# Altium PCB P-MT3620RDB-PS-1-0.PcbDoc (part 1 of 2)
Units mm, origin at the board's own origin, x right, y up, seen from the top; angles counter-clockwise.
Board outline 50 x 35 mm, 4 copper layers (Component Side, GND, 3V3, Bottom Layer), stack 0.537 mm thick; 57 components, 42 nets, 256 pads, 95 vias.
Unrouted connection lines stored in the file: 54.
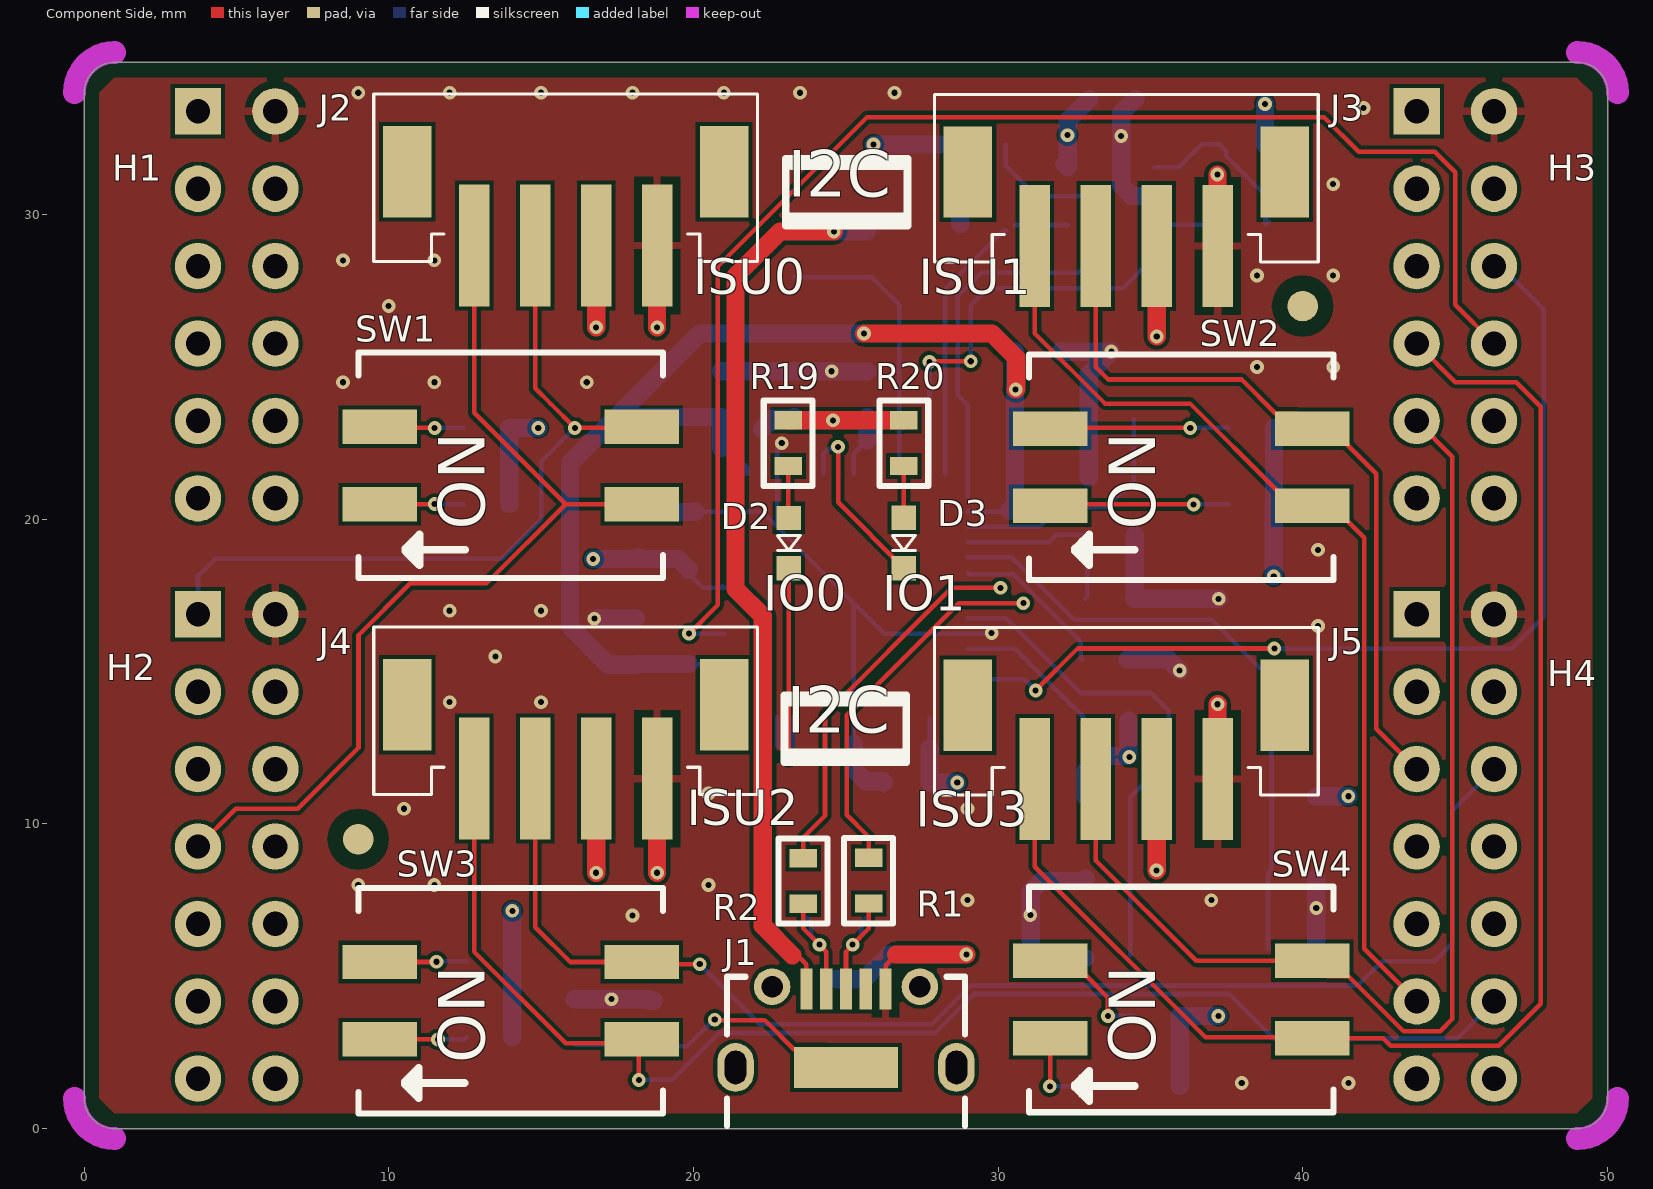
[diagram p0: Component Side view]
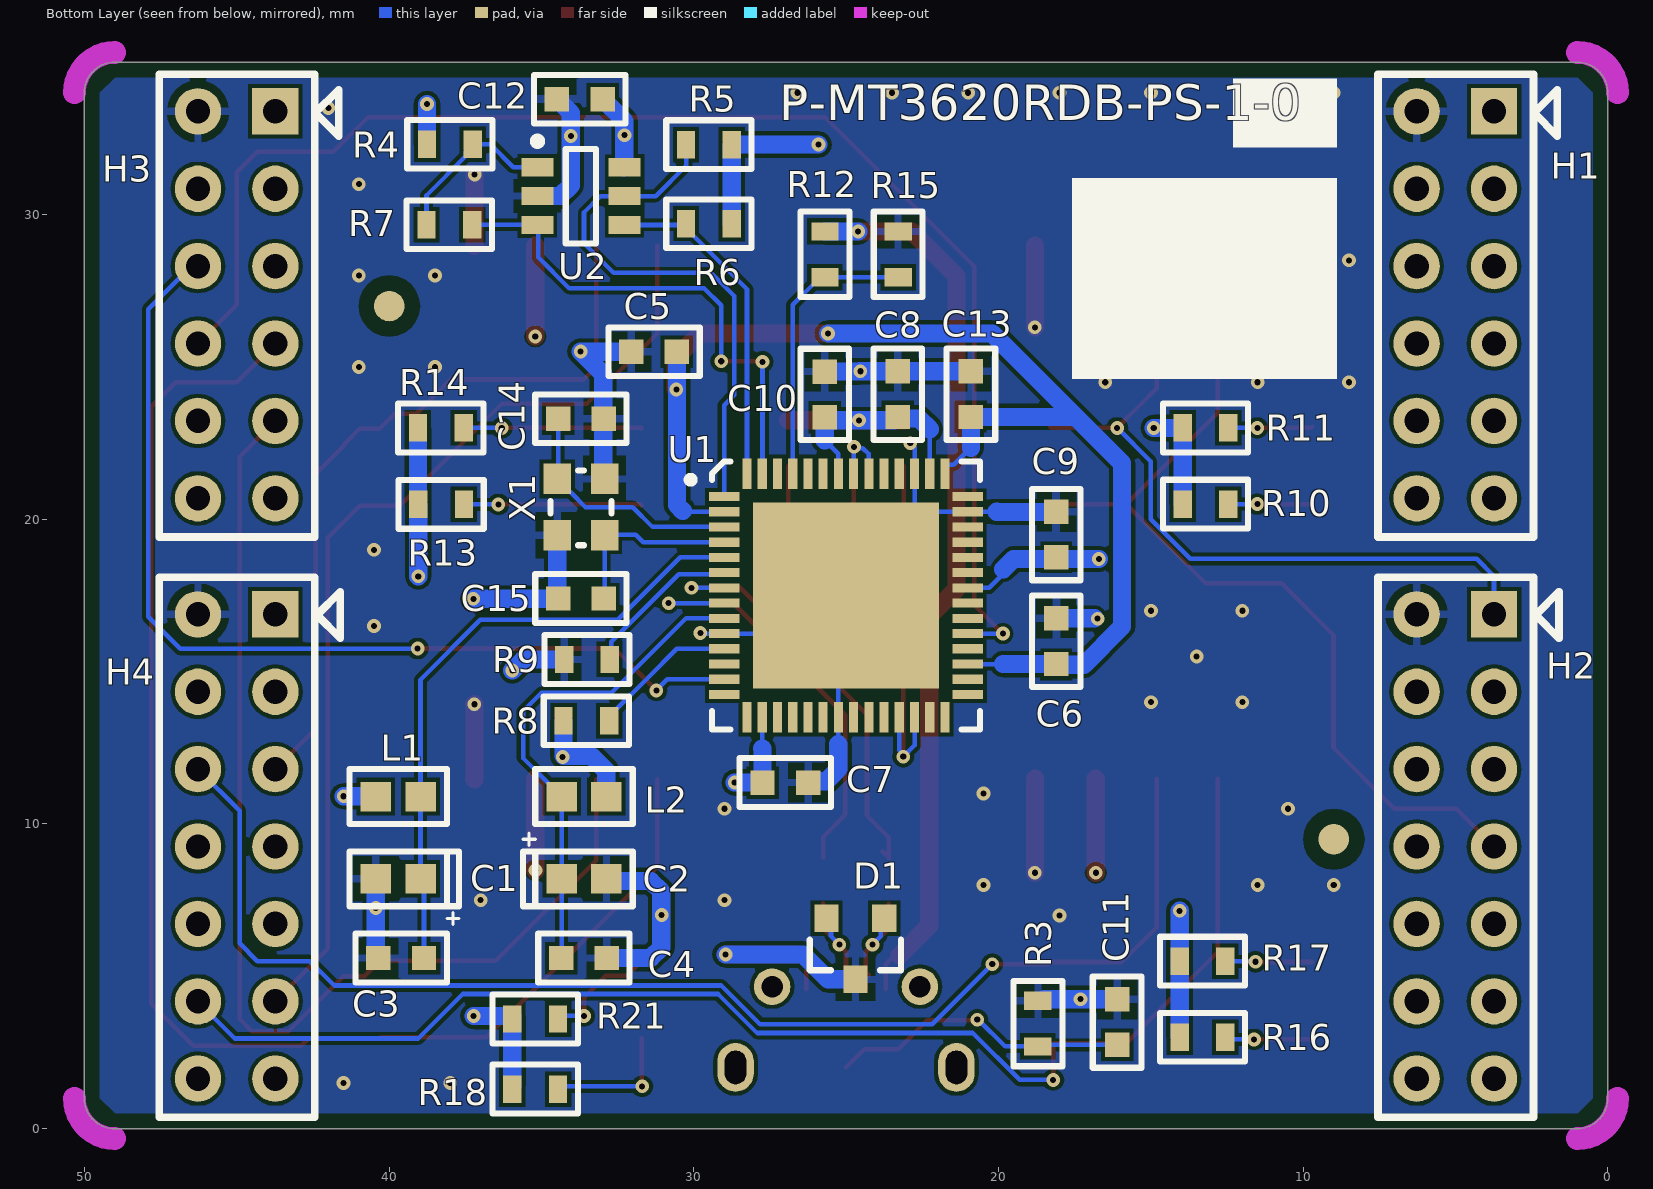
[diagram p1: Bottom Layer view, seen from below]
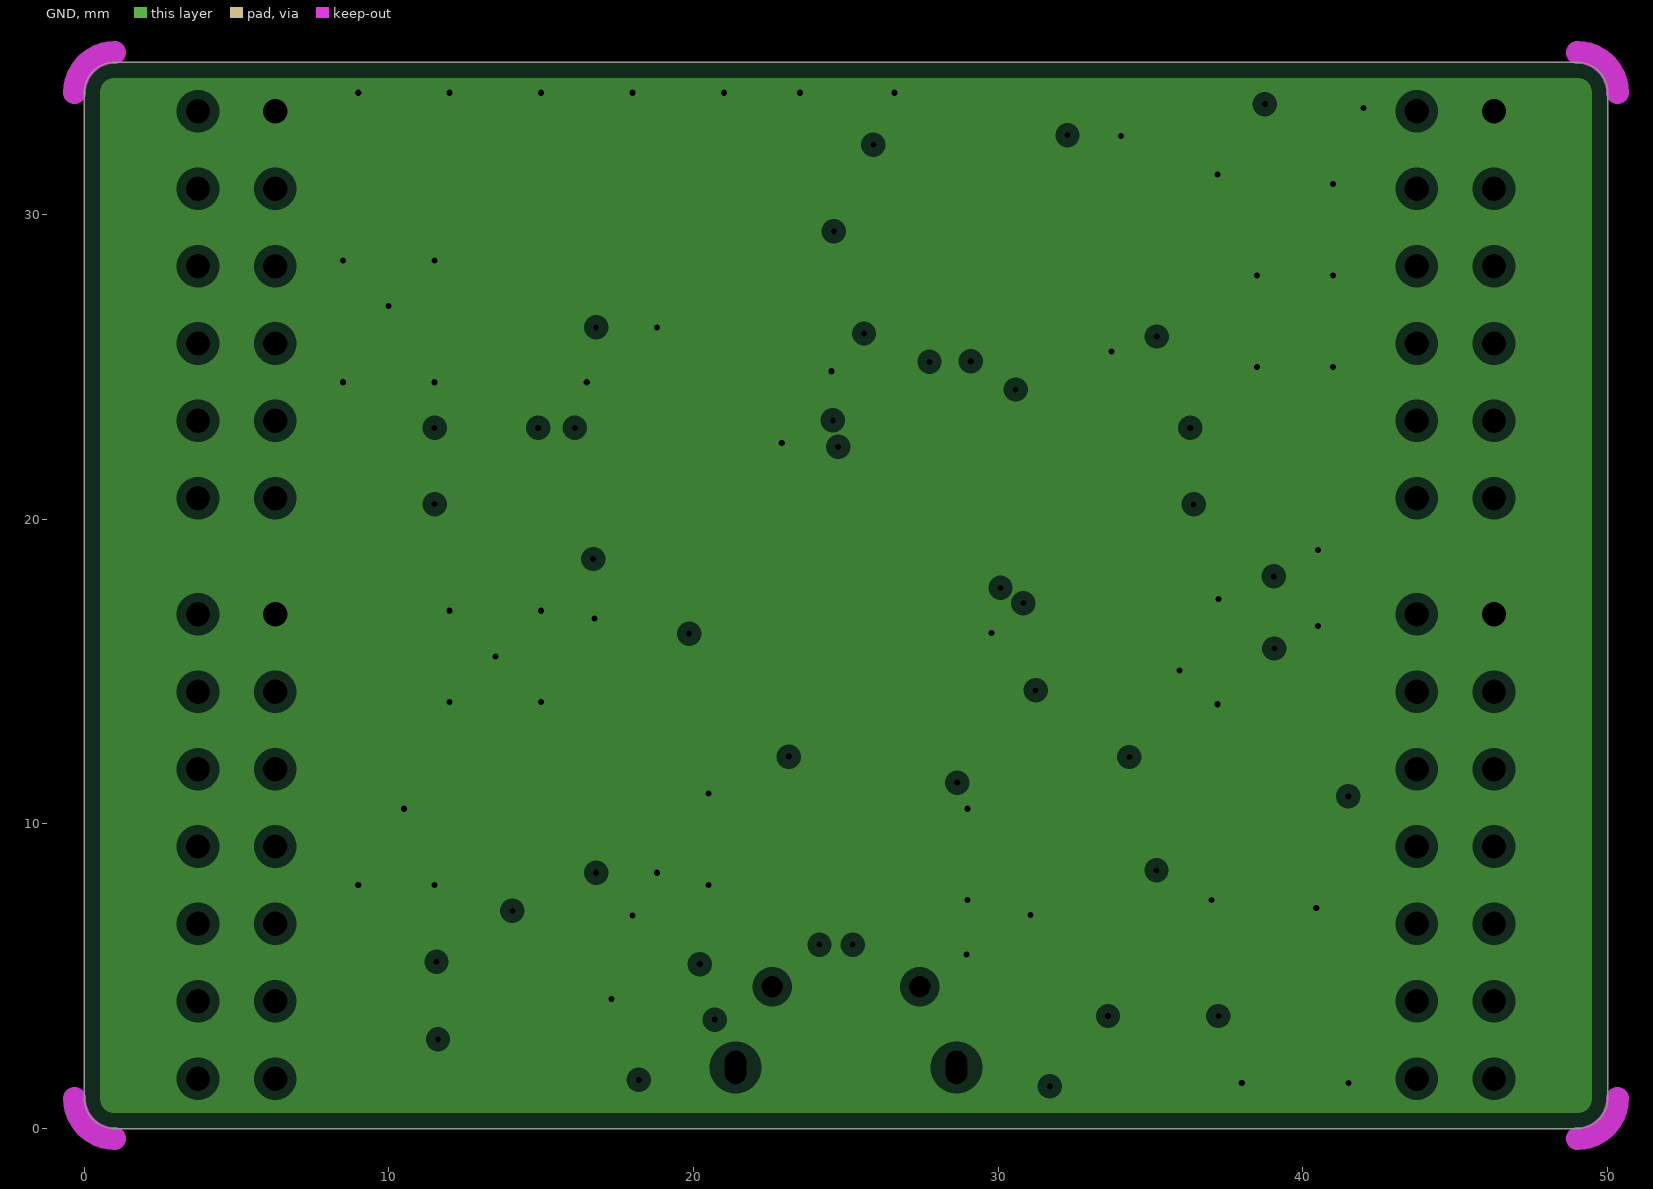
[diagram p2: GND, clearances drawn from the general rule]
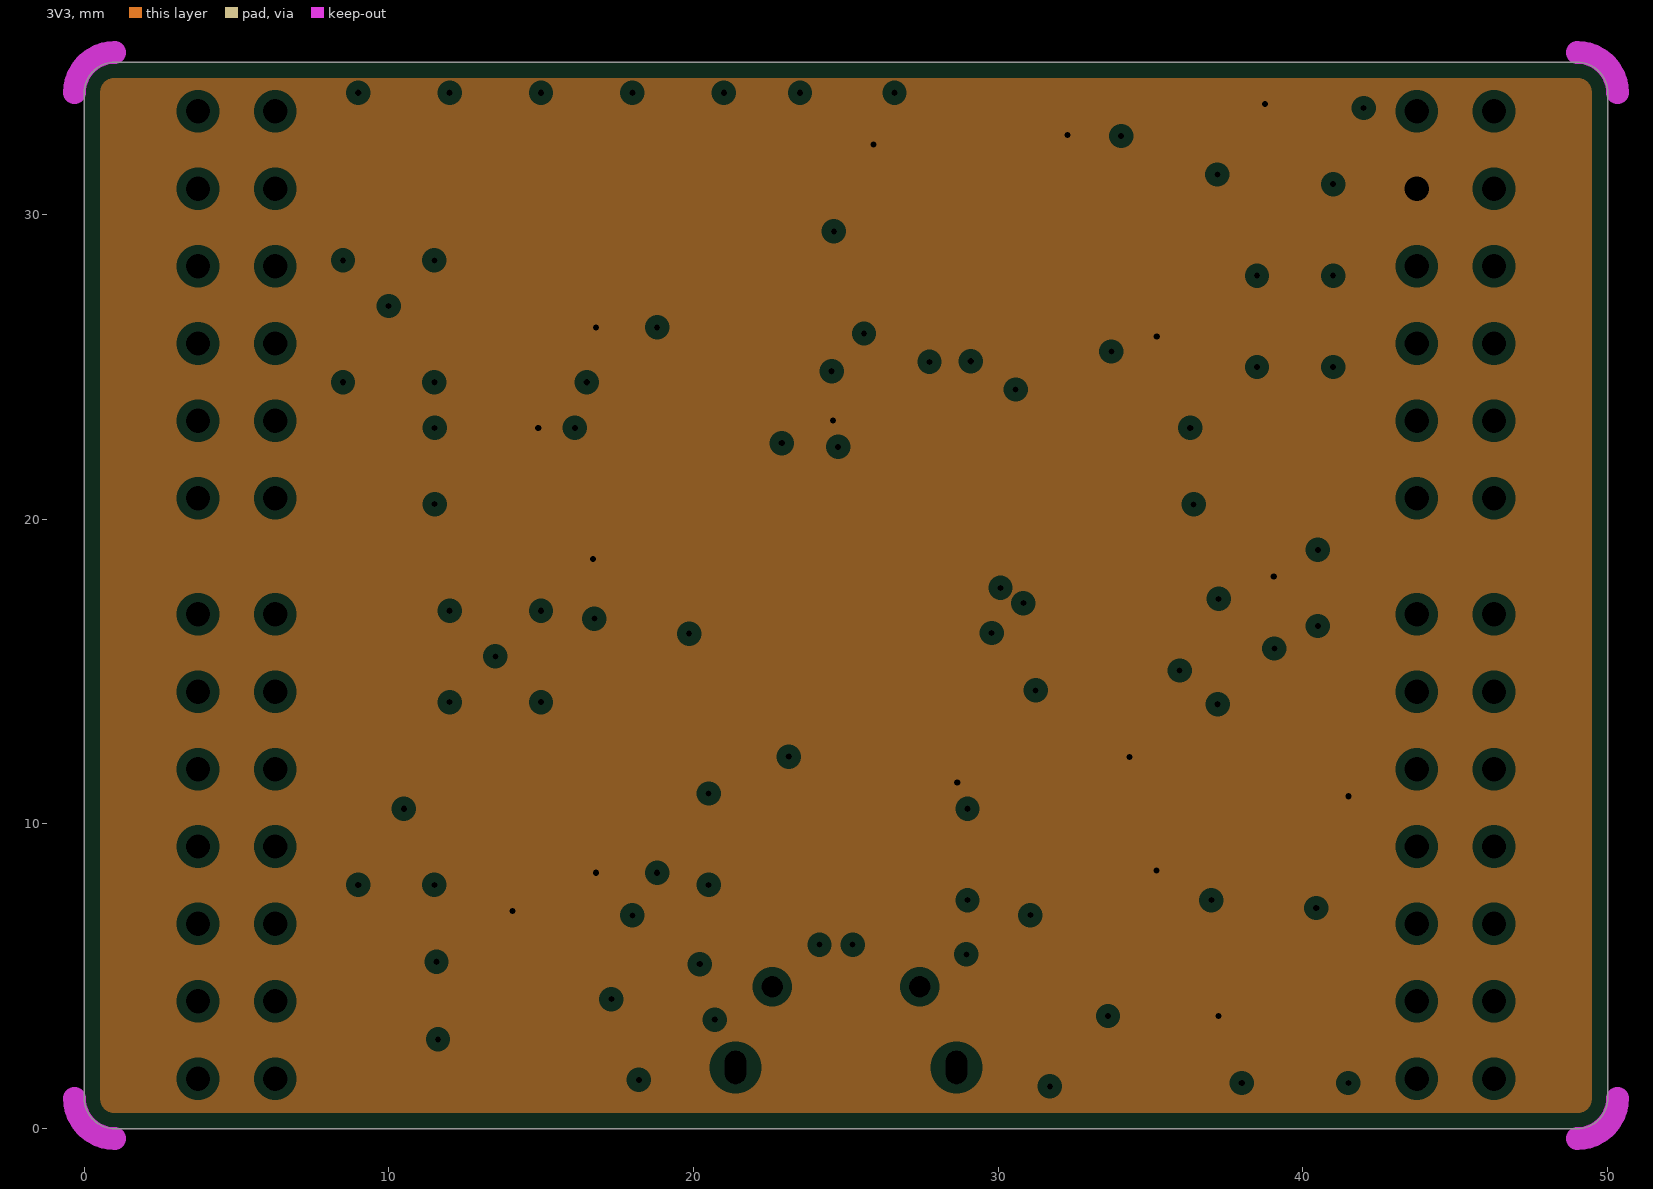
[diagram p3: 3V3, clearances drawn from the general rule]

## Layer stack, top to bottom
Top Solder: solder mask 0.0102, Solder Resist, Dk 3.5
Component Side: signal copper 0.0356
Dielectric 2: prepreg 0.0711, PP-006, Dk 4.1
GND: plane copper 0.035, net GND
Dielectric 1: core 0.254, FR-4, Dk 4.2
3V3: plane copper 0.035, net 3V3
Dielectric 3: prepreg 0.0711, PP-006, Dk 4.1
Bottom Layer: signal copper 0.0356
Solder Side: solder mask 0.0102, Solder Resist, Dk 3.5

## Board outline
1.01,0 cw(c1.01,1) 0.01,1 0.01,34 cw(c1.01,34) 1.01,35 49.01,35 cw(c49.01,34) 50.01,34 50.01,1 cw(c49.01,1) 49.01,0

## Design rules (kind name [scope] priority, off if disabled: settings)
Clearance Clearance_RF [InNetClass('RF') vs InNet('GND')] p1: gap=0.17 ignorepadtopadclearanceinfootprint=FALSE
Clearance Clearance_RFD [InNetClass('RFD') vs InNet('GND')] p2: gap=0.127 ignorepadtopadclearanceinfootprint=FALSE
Clearance Clearance_Fiducials [(IsPad) AND (Name = 'Free-1') vs InNet('GND')] p3: gap=0.5 ignorepadtopadclearanceinfootprint=FALSE
Clearance [All] p4: gap=0.125 ignorepadtopadclearanceinfootprint=FALSE
ComponentClearance [All] p1: gap=0.125 collisioncheckmode=3 verticalgap=0.254 showdistances=FALSE
DiffPairsRouting [All] p1: maxlimit=0.3 minlimit=0.125 mostfreqgap=0.125 toplayer_minwidth=0.125 toplayer_maxwidth=0.3 toplayer_prefwidth=0.125 bottomlayer_minwidth=0.125 bottomlayer_maxwidth=0.3 bottomlayer_prefwidth=0.125 maxuncoupledlength=12.7
HoleSize [All] p1: absolutevalues=TRUE maxlimit=3 minlimit=0.2 maxpercent=80.000 minpercent=20.000
MinimumSolderMaskSliver [All] p1: minsoldermaskwidth=0.01
PlaneClearance [All] p1: clearance=0.3
PlaneConnect PlaneConnect_IsVia [IsVia] p1: planeconnectstyle=Direct reliefexpansion=0.508 reliefentries=4 reliefconductorwidth=0.254 reliefairgap=0.254
PlaneConnect [All] p2: planeconnectstyle=Relief reliefexpansion=0.508 reliefentries=4 reliefconductorwidth=0.254 reliefairgap=0.254
PolygonConnect PolygonConnect_1 [All vs IsNamedPolygon('Component Side-No Net')] p1: connectstyle=Relief reliefconductorwidth=0.254 reliefentries=4 polygonreliefangle="90 Angle" airgapwidth=0.254
PolygonConnect PolygonConnect_IsVia [IsVia] p2: connectstyle=Direct reliefconductorwidth=0.254 reliefentries=4 polygonreliefangle="90 Angle" airgapwidth=0.254
PolygonConnect PolygonConnect_RF [HasCompParameter('NoThermalRelief')] p3: connectstyle=Direct reliefconductorwidth=0.254 reliefentries=4 polygonreliefangle="90 Angle" airgapwidth=0.254
PolygonConnect [All] p4: connectstyle=Relief reliefconductorwidth=0.254 reliefentries=4 polygonreliefangle="90 Angle" airgapwidth=0.254
RoutingCorners [All] p1: cornerstyle=45-Degree minsetback=1 maxsetback=1
RoutingVias [All] p1: holewidth=0.2 width=0.45 viastyle="Through Hole" minholewidth=0.2 minwidth=0.45 maxholewidth=0.2 maxwidth=0.45
SilkToSilkClearance [All] p1: silktosilkclearance=0.05
SilkToSolderMaskClearance [IsPad] p1: minsilkscreentomaskgap=0.1 clearancetoexposedcopper=TRUE
SolderMaskExpansion [All] p1: expansion=0.102 istentingtop=FALSE
Width [All] p1: maxlimit=1 minlimit=0.125 preferedwidth=0.15 minimp=50.000000 maximp=50.000000 favimp=50.000000
21 further rules are at their usual default settings.

## Components (designator, comment, footprint, x,y, rotation, side; value= is the part's Value field where it differs from the comment)
C1 "4.7UF" C0603_TANT 39.71,8.2 r0 bottom
C2 "4.7UF" C0603_TANT 33.61,8.2 r180 bottom
C3 "0.1uF" C0603 39.61,5.6 r0 bottom
C4 "0.1uF" C0603 33.61,5.6 r0 bottom
C5 "0.1uF" C0603 31.31,25.5 r180 bottom
C6 "0.1uF" C0603 18.11,16 r270 bottom
C7 "0.1uF" C0603 27,11.36 r180 bottom
C8 "0.1uF" C0603 23.31,24.11 r270 bottom
C9 "0.1uF" C0603 18.11,19.5 r270 bottom
C10 "0.1uF" C0603 25.71,24.1 r270 bottom
C11 "22pF" C0603 16.11,3.5 r270 bottom
C12 "0.1uF" C0603 33.75,33.79 r180 bottom
C13 "3.3uF" C0603 20.91,24.11 r270 bottom
C14 "10pF" C0603 33.71,23.3 r180 bottom
C15 "10pF" C0603 33.71,17.4 r0 bottom
D1 "PGB102ST23WRHF" SOT95P245X110-3N 24.7,5.9 r270 bottom
D2 "Green" "Rohm SML-D12 Green" 23.135,19.22 r90 top
D3 "Green" "Rohm SML-D12 Green" 26.91,19.225 r90 top
H1 "ESQ-106-14-G-D" ESQ-106 5.01,27.04 r270 bottom locked
H2 "ESQ-107-14-G-D" ESQ-107 5.01,9.261 r270 bottom locked
H3 "ESQ-106-14-G-D" ESQ-106 45.01,27.04 r270 bottom locked
H4 "ESQ-107-14-G-D" ESQ-107 45.01,9.261 r270 bottom locked
J1 "MCR-B-S-RA-SMT-CS5A-NF-T/R" MCR-B-S-RA-SMT-CS5-T/R 25.01,4.585 r180 top
J2 "Grove SMD" "GROVE WAY SMD" 15.81,30.2 r0 top locked
J3 "Grove SMD" "GROVE WAY SMD" 34.21,30.187 r0 top locked
J4 "Grove SMD" "GROVE WAY SMD" 15.81,12.7 r0 top locked
J5 "Grove SMD" "GROVE WAY SMD" 34.21,12.687 r0 top locked
L1 "120 Ohms 2A" "0603 IND" 39.71,10.9 r180 bottom
L2 "120 Ohms 2A" "0603 IND" 33.61,10.9 r0 bottom
R1 "10R" R0603 25.75,8.14 r90 top
R2 "10R" R0603 23.6,8.13 r90 top
R3 "1M" R0603 18.71,3.45 r270 bottom
R4 "10K" R0603 38.01,32.31 r0 bottom
R5 "10K" R0603 29.51,32.3 r180 bottom
R6 "10K" R0603 29.51,29.7 r180 bottom
R7 "2K2" R0603 38.03,29.67 r0 bottom
R8 "1K" R0603 33.53,13.39 r180 bottom
R9 "12K" R0603 33.51,15.4 r0 bottom
R10 "4K7" R0603 13.21,20.5 r0 bottom
R11 "4K7" R0603 13.21,23 r180 bottom
R12 "4K7" R0603 25.7,28.7 r90 bottom
R13 "4K7" R0603 38.3,20.49 r0 bottom
R14 "4K7" R0603 38.31,23 r180 bottom
R15 "10K" R0603 23.3,28.7 r90 bottom
R16 "4K7" R0603 13.31,3 r0 bottom
R17 "4K7" R0603 13.31,5.5 r180 bottom
R18 "4K7" R0603 35.21,1.3 r180 bottom
R19 "220R" R0603 23.11,22.5 r90 top
R20 "220R" R0603 26.91,22.5 r90 top
R21 "4K7" R0603 35.21,3.6 r0 bottom
SW1 "DPST" 204-211ST 14.01,21.77 r180 top locked
SW2 "DPST" 204-211ST 36.01,21.71 r180 top locked
SW3 "DPST" 204-211ST 14.01,4.2 r180 top locked
SW4 "DPST" 204-211ST 36.01,4.24 r180 top locked
U1 "FT2232H-56Q" FT2232H-56Q 25.01,17.5 r180 bottom locked
U2 "93LC56BT-I/OT" SOT23-93C56B 33.71,30.61 r180 bottom
X1 "12MHz" TXC8Z 33.71,20.4 r90 bottom

## Footprints (in the part's own frame and the unit in brackets; to place one, negate y for a bottom-side part, rotate by r counter-clockwise, add the part's x,y. Pads: shape width x height; smd on the part's side, far side on the other; paste and mask are expansions set on the pad)
204-211ST [mm]
  rect 2.44x1.13 smd: 1(-4.3,1.27) 2(-4.3,-1.27) 3(4.3,-1.27) 4(4.3,1.27)
  silkscreen extent -5,-3.7 5,3.7
"0603 IND" [mm]
  rect 1x0.97 smd: 1(-0.735,0) 2(0.735,0)
  silkscreen extent -1.6,-0.9 1.6,0.9
C0603 [mm]
  rect 0.8x0.8 smd: 1(-0.75,0) 2(0.75,0)
  silkscreen extent -1.5,-0.8 1.5,0.8
C0603_TANT [mm]
  rect 1x0.97 smd: 1(-0.735,0) 2(0.735,0)
  silkscreen extent -2,-0.9 1.6,1.5
ESQ-106 [mil]
  rect 60x60 hole 31.5: 1(-250,50)
  round 60 hole 31.5: 2(-250,-50) 3(-150,50) 4(-150,-50) 5(-50,50) 6(-50,-50) 7(50,50) 8(50,-50) 9(150,50) 10(150,-50) 11(250,50) 12(250,-50)
  silkscreen extent -298,-100 300,132
ESQ-107 [mil]
  rect 60x60 hole 31.5: 1(-300,50)
  round 60 hole 31.5: 2(-300,-50) 3(-200,50) 4(-200,-50) 5(-100,50) 6(-100,-50) 7(0,50) 8(0,-50) 9(100,50) 10(100,-50) 11(200,50) 12(200,-50) 13(300,50) 14(300,-50)
  silkscreen extent -348,-100 350,134
FT2232H-56Q [mm]
  rect 1x0.3 smd mask+0.051: 1(-4,3.25) 2(-4,2.75) 3(-4,2.25) 4(-4,1.75) 5(-4,1.25) 6(-4,0.75) 7(-4,0.25) 8(-4,-0.25) 9(-4,-0.75) 10(-4,-1.25) 11(-4,-1.75) 12(-4,-2.25) 13(-4,-2.75) 14(-4,-3.25) 29(4,-3.25) 30(4,-2.75) 31(4,-2.25) 32(4,-1.75) 33(4,-1.25) 34(4,-0.75) 35(4,-0.25) 36(4,0.25) 37(4,0.75) 38(4,1.25) 39(4,1.75) 40(4,2.25) 41(4,2.75) 42(4,3.25)
  rect 0.3x1 smd mask+0.051: 15(-3.25,-4) 16(-2.75,-4) 17(-2.25,-4) 18(-1.75,-4) 19(-1.25,-4) 20(-0.75,-4) 21(-0.25,-4) 22(0.25,-4) 23(0.75,-4) 24(1.25,-4) 25(1.75,-4) 26(2.25,-4) 27(2.75,-4) 28(3.25,-4) 43(3.25,4) 44(2.75,4) 45(2.25,4) 46(1.75,4) 47(1.25,4) 48(0.75,4) 49(0.25,4) 50(-0.25,4) 51(-0.75,4) 52(-1.25,4) 53(-1.75,4) 54(-2.25,4) 55(-2.75,4) 56(-3.25,4)
  rect 6.1x6.1 smd paste-0.5 mask+0.051: 57(0,0)
  silkscreen extent -5.2,-4.4 4.4,4.4
"GROVE WAY SMD" [mm]
  rect 1x4 smd: 1(-3,-1.212) 2(-1,-1.212) 3(1,-1.212) 4(3,-1.212)
  rect 1.6x3 smd: A1(-5.2,1.213) A1(5.2,1.213)
  silkscreen extent -6.3,-1.74 6.3,3.76
MCR-B-S-RA-SMT-CS5-T/R [mm]
  rect 0.4x1.35 smd: 1(1.3,0) 2(0.65,0) 3(0,0) 4(-0.65,0) 5(-1.3,0)
  rect 3.4x1.35 smd: 6(0,2.575)
  round 1.2 hole 0.7: 7(-2.425,-0.075) 8(2.425,-0.075)
  rrect100% 1.2x1.6 hole 0.7 slot 1.1 at 90 deg: 9(-3.625,2.575) 10(3.625,2.575)
  silkscreen extent -3.9,-0.4 3.9,4.5
R0603 [mm]
  rect 0.6x0.9 smd: 1(-0.75,0) 2(0.75,0)
  silkscreen extent -1.4,-0.8 1.4,0.8
"Rohm SML-D12 Green" [mm]
  rect 0.8x0.8 smd paste-0.05: 1(-0.825,0) 2(0.825,0)
  silkscreen extent -0.25,-0.38 0.25,0.38
SOT23-93C56B [mm] "SOT23, 6-Leads, Body 2.90x2.70mm, Pitch 0.95mm, IPC Medium Density"
  rect 1.05x0.6 smd: 1(-1.425,0.95) 2(-1.425,0) 3(-1.425,-0.95) 4(1.425,-0.95) 5(1.425,0) 6(1.425,0.95)
  silkscreen extent -1.55,-1.55 0.5,1.92
SOT95P245X110-3N [mm] "SOT23, 3-Leads, Body 2.90x2.45mm, Pitch 0.95mm, IPC Medium Density"
  rect 0.9x0.8 smd: 1(-1,0.95) 2(-1,-0.95) 3(1,0)
  silkscreen extent -0.3,-1.5 0.7,1.5
TXC8Z [mm] "2.5x2.0mm SMD Crystal"
  rect 1x0.9 smd: 1(-0.925,-0.775) 2(0.925,-0.775) 3(0.925,0.775) 4(-0.925,0.775)
  silkscreen extent -1.25,-1 1.2,1

## Part data
C1 C2: library part F981A475MMA, "AVX - F981A475MMA - Surface Mount Tantalum Capacitor, 4.7 µF, 10 V, 0603 [1608 Metric], F98 Series, ± 20%, -55 °C", Capacitance=4.7uF, Case Code (Imperial)=0603, Case Code (Metric)=1608, ESR (Equivalent Series Resistance)=6R, Manufacturer="Kyocera AVX", Max Operating Temperature=125°C, Min Operating Temperature=-55°C, Supplier Part Number 1=478-8651-1-ND, Tolerance=20%, Voltage Rating=10V, Case/Package=0603, Category="Tantalum Capacitors", ComponentLink1Description=http://www.farnell.com/datasheets/2602422.pdf?src-supplier=Farnell, ComponentLink1URL=http://www.farnell.com/datasheets/2602422.pdf?src-supplier=Farnell, ComponentLink2Description=http://www.mouser.com/ds/2/40/f98-775787.pdf?src-supplier=Mouser, ComponentLink2URL=http://www.mouser.com/ds/2/40/f98-775787.pdf?src-supplier=Mouser, ComponentLink3Description=http://datasheets.avx.com/F98.pdf?src-supplier=Digi-Key, ComponentLink3URL=http://datasheets.avx.com/F98.pdf?src-supplier=Digi-Key, ComponentLink4Description=http://www.farnell.com/datasheets/2602422.pdf?src-supplier=Newark, ComponentLink4URL=http://www.farnell.com/datasheets/2602422.pdf?src-supplier=Newark, Features="General Purpose", Manufacturer Part Number=F981A475MMA, Mount="Surface Mount", Packaging="Tape and Reel", Pricing 1="1=0.59000, 10=0.41800, 50=0.31640, 100=0.27560, 500=0.20412, 1000=0.17350 (USD)", RoHS=Yes, Stock 1=17846, Supplier 1=Digi-Key
C3 C4 C5 C6 C7 C8 C9 C10 C12: library part CL10B104KB8NNNL, "CL10 Series 0603 0.1 uF 50 V ±10% Tolerance X7R Multilayer Ceramic Capacitor", Capacitance=100nF, Case/Package=0603, Dielectric=X7R, Manufacturer=Samsung, Max Operating Temperature=125°C, Min Operating Temperature=-55°C, Package Quantity=15000, Supplier Part Number 1=1276-CL10B104KB8NNNLCT-ND, Tolerance=10%, Voltage Rating=50V, Category="Ceramic Capacitors", ComponentLink1Description=https://datasheet.ciiva.com/26838/getdatasheetpartid-357523-26838415.pdf?src-supplier=Verical, ComponentLink1URL=https://datasheet.ciiva.com/26838/getdatasheetpartid-357523-26838415.pdf?src-supplier=Verical, ComponentLink2Description=https://datasheet.ciiva.com/25741/cl10b104kb8nnnl-25741341.pdf?src-supplier=Digi-Key, ComponentLink2URL=https://datasheet.ciiva.com/25741/cl10b104kb8nnnl-25741341.pdf?src-supplier=Digi-Key, Depth=0.8mm, Height=0.8mm, Length=1.6mm, Manufacturer Part Number=CL10B104KB8NNNL, Mount="Surface Mount", Packaging="Tape and Reel", Pricing 1="1=0.10000, 10=0.02900, 50=0.01580, 100=0.01280, 500=0.00916, 1000=0.00720, 2500=0.00654, 5000=0.00602 (USD)", Radiation Hardening=No, RoHS=Yes, Stock 1=148896, Supplier 1=Digi-Key, Thickness=0.035inch, Voltage Rating (DC)=50V, Width=0.031inch
C11: library part CC0603JRNPO9BN220, "Cap Ceramic 22pF 50VDC C0G 5% SMD 0603 Paper T/R", Case Code (Imperial)=0603, Case Code (Metric)=1608, Dielectric=C0G, Insulation Resistance=10GR, Manufacturer=Yageo, Max Operating Temperature=125°C, Min Operating Temperature=-55°C, Package Quantity=1, Supplier Part Number 1=311-1062-1-ND, Temperature Coefficient=30ppm/°C, Tolerance=5%, Voltage=50V, Capacitance=22pF, Case/Package=0603, Category="Ceramic Capacitors", ComponentLink1Description=https://datasheet.ciiva.com/11786/0900766b8079c870-11786216.pdf?src-supplier=RSComponents, ComponentLink1URL=https://datasheet.ciiva.com/11786/0900766b8079c870-11786216.pdf?src-supplier=RSComponents, ComponentLink2Description=https://datasheet.ciiva.com/8033/1734582-8033749.pdf?src-supplier=Element14, ComponentLink2URL=https://datasheet.ciiva.com/8033/1734582-8033749.pdf?src-supplier=Element14, ComponentLink3Description=https://datasheet.ciiva.com/144/mlccorderingcode-144631.pdf?src-supplier=Digi-Key, ComponentLink3URL=https://datasheet.ciiva.com/144/mlccorderingcode-144631.pdf?src-supplier=Digi-Key, ComponentLink4Description=https://datasheet.ciiva.com/28450/1443161-28450487.pdf?src-supplier=Element14, ComponentLink4URL=https://datasheet.ciiva.com/28450/1443161-28450487.pdf?src-supplier=Element14, ComponentLink5Description=https://datasheet.ciiva.com/144/mlccorderingcode-144632.pdf?src-supplier=Digi-Key, ComponentLink5URL=https://datasheet.ciiva.com/144/mlccorderingcode-144632.pdf?src-supplier=Digi-Key, ComponentLink6Description=https://datasheet.ciiva.com/11464/upy-gp-np0-16v-to-50v-8-11464728.pdf?src-supplier=Avnet, ComponentLink6URL=https://datasheet.ciiva.com/11464/upy-gp-np0-16v-to-50v-8-11464728.pdf?src-supplier=Avnet, ComponentLink7Description=https://datasheet.ciiva.com/144/mlccorderingcode-144633.pdf?src-supplier=Digi-Key, ComponentLink7URL=https://datasheet.ciiva.com/144/mlccorderingcode-144633.pdf?src-supplier=Digi-Key, ComponentLink8Description=https://datasheet.ciiva.com/46430/1835847-46430153.pdf?src-supplier=Element14, ComponentLink8URL=https://datasheet.ciiva.com/46430/1835847-46430153.pdf?src-supplier=Element14, ComponentLink9Description=https://datasheet.ciiva.com/16625/upy-gp-np0-16v-to-50v-8-16625518.pdf?src-supplier=Avnet+Europe, ComponentLink9URL=https://datasheet.ciiva.com/16625/upy-gp-np0-16v-to-50v-8-16625518.pdf?src-supplier=Avnet+Europe, Depth=0.8mm, Height=0.8mm, Lead Free="Lead Free", Length=1.6mm, Manufacturer Part Number=CC0603JRNPO9BN220, Mount="Surface Mount", Number of Pins=2, Packaging="Tape and Reel", Pricing 1="1=0.10000, 10=0.04200, 50=0.02320, 100=0.01890, 500=0.01348, 1000=0.01059 (USD)", Radiation Hardening=No, REACH SVHC="No SVHC", RoHS=Yes, Stock 1=139430, Supplier 1=Digi-Key, Termination=SMD/SMT, Thickness=0.035inch, Voltage Rating=50V, Voltage Rating (DC)=50V, Width=0.031inch
C13: library part CL10A335KP8NNNC, "CAP CER 3.3UF 10V X5R 0603", Case Code (Imperial)=0603, Case Code (Metric)=1608, Dielectric=X5R, Manufacturer=Samsung, Max Operating Temperature=85°C, Min Operating Temperature=-55°C, Package Quantity=1, Supplier Part Number 1=1276-1892-1-ND, Tolerance=10%, Voltage Rating=10V, Capacitance=3.3uF, Case/Package=0603, Category="Ceramic Capacitors", ComponentLink1Description=https://datasheet.ciiva.com/25794/cl10a335kp8nnnc-25794982.pdf?src-supplier=Digi-Key, ComponentLink1URL=https://datasheet.ciiva.com/25794/cl10a335kp8nnnc-25794982.pdf?src-supplier=Digi-Key, ComponentLink2Description=https://datasheet.ciiva.com/26838/getdatasheetpartid-362799-26838374.pdf?src-supplier=Verical, ComponentLink2URL=https://datasheet.ciiva.com/26838/getdatasheetpartid-362799-26838374.pdf?src-supplier=Verical, Depth=0.8mm, Height=0.8mm, Lead Free="Lead Free", Length=1.6mm, Manufacturer Part Number=CL10A335KP8NNNC, Mount="Surface Mount", Packaging="Tape and Reel", Pricing 1="1=0.20000, 10=0.13600, 50=0.08180, 100=0.06910, 500=0.04730, 1000=0.04185 (USD)", Radiation Hardening=No, RoHS=Yes, Stock 1=195650, Supplier 1=Digi-Key, Thickness=0.035inch, Voltage Rating (DC)=10V, Width=0.031inch
C14 C15: library part CC0603FRNPO0BN100, "Cap Cer 10PF 100V Npo 0603", Case/Package=0603, Manufacturer=Yageo, Max Operating Temperature=125°C, Min Operating Temperature=-55°C, Supplier Part Number 1=311-3876-1-ND, Tolerance=1%, Voltage Rating=100V, Capacitance=10pF, Category="Ceramic Capacitors", ComponentLink1Description=https://media.digikey.com/pdf/Data%20Sheets/Yageo%20PDFs/CCseries_mlcc_2002.pdf?src-supplier=Digi-Key, ComponentLink1URL=https://media.digikey.com/pdf/Data%20Sheets/Yageo%20PDFs/CCseries_mlcc_2002.pdf?src-supplier=Digi-Key, ComponentLink2Description=http://www.yageo.com/exep/pages/download/literatures/ProductSelectionGuide%202014_Final_2.pdf?src-supplier=Digi-Key, ComponentLink2URL=http://www.yageo.com/exep/pages/download/literatures/ProductSelectionGuide%202014_Final_2.pdf?src-supplier=Digi-Key, Length=0.063inch, Manufacturer Part Number=CC0603FRNPO0BN100, Mount="Surface Mount", Packaging="Tape and Reel", Pricing 1="1=0.19000, 10=0.12700, 50=0.07620, 100=0.06440, 500=0.04408, 1000=0.03899 (USD)", RoHS=Yes, Stock 1=23309, Supplier 1=Digi-Key, Thickness=0.035inch, Width=0.031inch
D1: "Tvs Diode 24V 150V SOT23-3", Capacitance=0.12pF, Case/Package=SOT-23, Clamping Voltage=150V, Leakage Current=1nA, Manufacturer=Littelfuse, Max Operating Temperature=125°C, Min Operating Temperature=-65°C, Package Quantity=1, Power Line Protection=No, Resistor Type=Zener, Reverse Standoff Voltage=24V, Supplier Part Number 1=F3800CT-ND, Category="TVS Diodes", ComponentLink1Description=https://datasheet.ciiva.com/25606/0900766b81107f7b-25606505.pdf?src-supplier=RSComponents, ComponentLink1URL=https://datasheet.ciiva.com/25606/0900766b81107f7b-25606505.pdf?src-supplier=RSComponents, ComponentLink2Description=https://datasheet.ciiva.com/341/littelfuse-pulseguard-esd-pgb1-341254.pdf?src-supplier=Digi-Key, ComponentLink2URL=https://datasheet.ciiva.com/341/littelfuse-pulseguard-esd-pgb1-341254.pdf?src-supplier=Digi-Key, ComponentLink3Description=https://datasheet.ciiva.com/349/littelfuse-pulseguard-esd-pgb1-349471.pdf?src-supplier=Digi-Key, ComponentLink3URL=https://datasheet.ciiva.com/349/littelfuse-pulseguard-esd-pgb1-349471.pdf?src-supplier=Digi-Key, ComponentLink4Description=https://datasheet.ciiva.com/354/littelfuse-pulseguard-esd-pgb1-354671.pdf?src-supplier=Digi-Key, ComponentLink4URL=https://datasheet.ciiva.com/354/littelfuse-pulseguard-esd-pgb1-354671.pdf?src-supplier=Digi-Key, Depth=2.24mm, Diode Type=ZENER, Direction=Bidirectional, Element Configuration=Dual, Height=0.69mm, Length=3mm, Manufacturer Part Number=PGB102ST23WRHF, Mount="Surface Mount", Number of Bidirectional Channels=2, Number of Channels=2, Number of Pins=3, Packaging="Tape and Reel", Pricing 1="1=0.95000, 10=0.85300, 100=0.66510, 500=0.54946, 1000=0.43904 (USD)", Radiation Hardening=No, RoHS=Yes, RoHS Compliant=Yes, Series="PulseGuard® PGB", Stock 1=1690, Supplier 1=Digi-Key, Termination=SMD/SMT, Working Voltage=24V
D2 D3: library part SML-D12P8WT86, "ROHM - SML-D12P8WT86 - LED, EXCELED, Green, SMD, 0603, 20 mA, 2.2 V, 560 nm", Case Code (Imperial)=0603, Case Code (Metric)=1608, Forward Current=20mA, Forward Voltage=2.2V, Lens Color=White, Manufacturer=Rohm, Max Operating Temperature=85°C, Min Operating Temperature=-40°C, Package Quantity=1, Supplier Part Number 1=511-1579-1-ND, Case/Package=0603, Category=LEDs, Color=Green, ComponentLink1Description=https://datasheet.ciiva.com/2110/sml-d1-2110417.pdf?src-supplier=Digi-Key, ComponentLink1URL=https://datasheet.ciiva.com/2110/sml-d1-2110417.pdf?src-supplier=Digi-Key, ComponentLink2Description=https://datasheet.ciiva.com/16488/rohm20sml-d12p8wt86-16488100.pdf?src-supplier=Future+Electronics, ComponentLink2URL=https://datasheet.ciiva.com/16488/rohm20sml-d12p8wt86-16488100.pdf?src-supplier=Future+Electronics, ComponentLink3Description=https://datasheet.ciiva.com/2110/sml-d1-2110418.pdf?src-supplier=Digi-Key, ComponentLink3URL=https://datasheet.ciiva.com/2110/sml-d1-2110418.pdf?src-supplier=Digi-Key, ComponentLink4Description=https://datasheet.ciiva.com/2110/sml-d1-2110419.pdf?src-supplier=Digi-Key, ComponentLink4URL=https://datasheet.ciiva.com/2110/sml-d1-2110419.pdf?src-supplier=Digi-Key, ComponentLink5Description=https://datasheet.ciiva.com/3161/sml-d1-3161420.pdf?src-supplier=Avnet, ComponentLink5URL=https://datasheet.ciiva.com/3161/sml-d1-3161420.pdf?src-supplier=Avnet, Dominant Wavelength=560nm, Height=0.65mm, Illumination Color=Green, Lead Free="Lead Free", Length=1.6mm, Lens Style=Rectangular,Diffused,Colorless, Lens Transparency=Diffused, Luminous Intensity=6.3mcd, Manufacturer Part Number=SML-D12P8WT86, Mount="Surface Mount", Number of LEDs=1, Number of Pins=2, Packaging="Tape and Reel", Pricing 1="1=0.31000, 10=0.22600, 100=0.10730, 500=0.07200, 1000=0.05640 (USD)", Radiation Hardening=No, REACH SVHC=Unknown, RoHS=Yes, Stock 1=30006, Supplier 1=Digi-Key, Test Current=20mA, Viewing Angle=160°, Wavelength=560nm, Width=0.8mm
H1 H3: "Conn Elevated Socket SKT 12 POS 2.54mm Solder ST Thru-Hole Tube", Contact Resistance=10mR, Housing Color=Black, Manufacturer=Samtec, Max Current Rating=6.9A, Max Operating Temperature=125°C, Max Voltage Rating (AC)=550V, Min Operating Temperature=-55°C, Supplier Part Number 1=SAM15564-ND, Category=Connectors, ComponentLink1Description=http://www.farnell.com/datasheets/1992053.pdf?src-supplier=Farnell, ComponentLink1URL=http://www.farnell.com/datasheets/1992053.pdf?src-supplier=Farnell, ComponentLink2Description=http://components.arrow.com/part/dataview/0323_01321805?src-supplier=Arrow+Europe, ComponentLink2URL=http://components.arrow.com/part/dataview/0323_01321805?src-supplier=Arrow+Europe, ComponentLink3Description=http://www.samtec.com/documents/webfiles/pdf/ESW_TH.PDF?src-supplier=Avnet+Europe, ComponentLink3URL=http://www.samtec.com/documents/webfiles/pdf/ESW_TH.PDF?src-supplier=Avnet+Europe, ComponentLink4Description=http://www.samtec.com/documents/webfiles/pdf/ESW_TH.PDF?src-supplier=Avnet, ComponentLink4URL=http://www.samtec.com/documents/webfiles/pdf/ESW_TH.PDF?src-supplier=Avnet, ComponentLink5Description=http://suddendocs.samtec.com/prints/esq-1xx-xx-x-x-xxx-xx-x-xx-mkt.pdf?src-supplier=Digi-Key, ComponentLink5URL=http://suddendocs.samtec.com/prints/esq-1xx-xx-x-x-xxx-xx-x-xx-mkt.pdf?src-supplier=Digi-Key, Contact Material=Bronze, Contact Plating=Gold, Depth=4.95mm, Gender=Receptacle, Housing Material=Polyester, Length=15.75mm, Manufacturer Part Number=ESQ-106-14-G-D, Number of Contacts=12, Number of Rows=2, Orientation=Straight, Packaging=Bulk, Pitch=2.54mm, Pricing 1="1=3.20000, 10=3.07200, 100=2.56000, 500=2.17600, 1000=1.85600, 5000=1.66400 (USD)", Radiation Hardening=No, REACH SVHC="No SVHC", RoHS=Yes, Stock 1=143, Supplier 1=Digi-Key, Termination=Solder
H2 H4: "SAMTEC         ESQ-107-14-G-D             Board-To-Board Connector, Elevated, ESQ Series, 14 Contacts, Receptacle, 2.54 mm, Solder, 2 Rows", Contact Resistance=10mR, Housing Color=Black, Manufacturer=Samtec, Max Current Rating=6.9A, Max Operating Temperature=125°C, Max Voltage Rating (AC)=550V, Min Operating Temperature=-55°C, Supplier Part Number 1=SAM15567-ND, Category="Headers and Wire Housings", ComponentLink1Description=http://components.arrow.com/part/dataview/0323_01327688?src-supplier=Arrow+Europe, ComponentLink1URL=http://components.arrow.com/part/dataview/0323_01327688?src-supplier=Arrow+Europe, ComponentLink2Description=http://www.farnell.com/datasheets/1992053.pdf?src-supplier=Farnell, ComponentLink2URL=http://www.farnell.com/datasheets/1992053.pdf?src-supplier=Farnell, ComponentLink3Description=http://cloud.samtec.com/catalog_english/ESW_TH.PDF?src-supplier=Avnet, ComponentLink3URL=http://cloud.samtec.com/catalog_english/ESW_TH.PDF?src-supplier=Avnet, ComponentLink4Description=http://suddendocs.samtec.com/prints/esq-1xx-xx-x-x-xxx-xx-x-xx-mkt.pdf?src-supplier=Digi-Key, ComponentLink4URL=http://suddendocs.samtec.com/prints/esq-1xx-xx-x-x-xxx-xx-x-xx-mkt.pdf?src-supplier=Digi-Key, Contact Material=Bronze, Contact Plating=Gold, Depth=4.95mm, Gender=Receptacle, Housing Material=Polyester, Lead Free="Lead Free", Length=18.29mm, Manufacturer Part Number=ESQ-107-14-G-D, Number of Contacts=14, Number of Rows=2, Orientation=Straight, Packaging=Rail/Tube, Pitch=2.54mm, Pricing 1="1=3.73000, 10=3.57600, 100=2.98000, 500=2.53300, 1000=2.16050, 5000=1.93700 (USD)", Radiation Hardening=No, REACH SVHC="No SVHC", RoHS=Yes, Stock 1=55, Supplier 1=Digi-Key, Termination=Solder
J1: Manufacturer="Adam Equipment", Supplier Part Number 1=2057-MCR-B-S-RA-SMT-CS5A-NF-T/RCT-ND, Manufacturer Part Number=MCR-B-S-RA-SMT-CS5A-NF-T/R, Pricing 1="1=0.34000, 10=0.31800, 25=0.27280, 50=0.23180, 100=0.22270, 250=0.20000, 500=0.19090 (USD)", RoHS=No, Stock 1=718, Supplier 1=Digi-Key
J2 J3 J4 J5: library part 114020163, Manufacturer="Seeed Studio", Supplier Part Number 1=1597-114020163-ND, Manufacturer Part Number=114020163, Pricing 1="1=2.96000 (USD)", RoHS=No, Stock 1=848, Supplier 1=Digi-Key
L1 L2: library part BLM18PG121SN1D, "MURATA - BLM18PG121SN1D - FERRITE, BEAD, 0603, 0.05OHM, 2A", Case Code (Imperial)=0603, Case Code (Metric)=1608, Current Rating=2A, DC Resistance (DCR)=50mR, Frequency=100MHz, Manufacturer=Murata, Max Operating Temperature=125°C, Min Operating Temperature=-55°C, Package Quantity=1, Supplier Part Number 1=490-1037-1-ND, Tolerance=25%, Case/Package=0603, Category=Inductors, ComponentLink1Description=https://datasheet.ciiva.com/5709/1740433-5709171.pdf?src-supplier=Farnell, ComponentLink1URL=https://datasheet.ciiva.com/5709/1740433-5709171.pdf?src-supplier=Farnell, ComponentLink2Description=https://datasheet.ciiva.com/11799/0900766b81275ca5-11799546.pdf?src-supplier=RSComponents, ComponentLink2URL=https://datasheet.ciiva.com/11799/0900766b81275ca5-11799546.pdf?src-supplier=RSComponents, ComponentLink3Description=https://datasheet.ciiva.com/19454/1845013-19454715.pdf?src-supplier=Jameco, ComponentLink3URL=https://datasheet.ciiva.com/19454/1845013-19454715.pdf?src-supplier=Jameco, ComponentLink4Description=https://datasheet.ciiva.com/29347/442365-da-01-en-chip-drossel-0603-120r-2000ma-1-6x0-8mm-29347911.pdf?src-supplier=Conrad, ComponentLink4URL=https://datasheet.ciiva.com/29347/442365-da-01-en-chip-drossel-0603-120r-2000ma-1-6x0-8mm-29347911.pdf?src-supplier=Conrad, ComponentLink5Description=https://datasheet.ciiva.com/3081/l0110s0100blm18p-3081632.pdf?src-supplier=Avnet, ComponentLink5URL=https://datasheet.ciiva.com/3081/l0110s0100blm18p-3081632.pdf?src-supplier=Avnet, ComponentLink6Description=https://datasheet.ciiva.com/8021/1740433-8021493.pdf?src-supplier=Element14, ComponentLink6URL=https://datasheet.ciiva.com/8021/1740433-8021493.pdf?src-supplier=Element14, ComponentLink7Description=https://datasheet.ciiva.com/6212/l0110s0100blm18p-6212502.pdf?src-supplier=Digi-Key, ComponentLink7URL=https://datasheet.ciiva.com/6212/l0110s0100blm18p-6212502.pdf?src-supplier=Digi-Key, ComponentLink8Description=https://datasheet.ciiva.com/8021/1740433-8021494.pdf?src-supplier=Element14, ComponentLink8URL=https://datasheet.ciiva.com/8021/1740433-8021494.pdf?src-supplier=Element14, ComponentLink9Description=https://datasheet.ciiva.com/6212/l0110s0100blm18p-6212504.pdf?src-supplier=Digi-Key, ComponentLink9URL=https://datasheet.ciiva.com/6212/l0110s0100blm18p-6212504.pdf?src-supplier=Digi-Key, ComponentLink10Description=https://datasheet.ciiva.com/14122/blm-series-eng-tds-14122905.pdf?src-supplier=Distrelec, ComponentLink10URL=https://datasheet.ciiva.com/14122/blm-series-eng-tds-14122905.pdf?src-supplier=Distrelec, ComponentLink11Description=https://datasheet.ciiva.com/25903/l0110s0100blm18p-25903483.pdf?src-supplier=Avnet+Europe, ComponentLink11URL=https://datasheet.ciiva.com/25903/l0110s0100blm18p-25903483.pdf?src-supplier=Avnet+Europe, ComponentLink12Description=https://datasheet.ciiva.com/41449/001172297-da-01-en-drossel-0603-120r-1-6x0-8mm-4000st-41449659.pdf?src-supplier=Conrad, ComponentLink12URL=https://datasheet.ciiva.com/41449/001172297-da-01-en-drossel-0603-120r-1-6x0-8mm-4000st-41449659.pdf?src-supplier=Conrad, Core Material=Ferrite, DC Current=2A, Depth=0.8mm, Height=0.8mm, Impedance=120R, Lead Free="Lead Free", Length=1.6mm, Manufacturer Part Number=BLM18PG121SN1D, Material=Steel,Ferrite, Max Current Rating=2A, Max DC Current=2A, Number of Circuits=1, Number of Lines=1, Number of Pins=2, Packaging="Tape and Reel", Pricing 1="1=0.10000, 10=0.07600, 25=0.06920, 50=0.06220, 100=0.04550, 250=0.03312, 500=0.03036, 1000=0.02622 (USD)", Radiation Hardening=No, REACH SVHC="No SVHC", RoHS=Yes, Shielding=Unshielded, Stock 1=386931, Supplier 1=Digi-Key, Termination=SMD/SMT, Test Frequency=100MHz, Width=0.8mm
R1 R2: library part RC0603FR-0710RL, "YAGEO (PHYCOMP) - RC0603FR-0710RL - RES, THICK FILM, 10R, 1%, 0.1W, 0603", Case Code (Imperial)=0603, Case Code (Metric)=1608, Manufacturer=Yageo, Max Operating Temperature=155°C, Max Power Dissipation=100mW, Min Operating Temperature=-55°C, Resistance Tolerance=1%, Resistor Type="Thick Film", Supplier Part Number 1=311-10.0HRCT-ND, Temperature Coefficient=200ppm/°C, Voltage Rating=50V, Case/Package=0603, Category="Chip SMD Resistors", Construction=Rectangular, Contact Plating=Tin,Matte, Depth=0.8mm, Features="Moisture Resistant", Height=0.45mm, Lead Free="Lead Free", Length=1.6mm, Manufacturer Part Number=RC0603FR-0710RL, Military Standard=Not, Number of Pins=2, Number of Terminations=2, Packaging="Tape and Reel", Power Rating=100mW, Pricing 1="1=0.10000, 10=0.04800, 100=0.01940, 1000=0.00872, 2500=0.00756 (USD)", Radiation Hardening=No, REACH SVHC="No SVHC", Resistance=10R, RoHS=Yes, RoHS Compliant=Yes, Series=RC, Size Code=0603, Stock 1=5266978, Supplier 1=Digi-Key, Technology="THICK FILM", Termination=SMD/SMT, Tolerance=1%, Voltage Rating (DC)=50V, Width=0.8mm
R3: library part AC0603FR-071ML, "RES SMD 1M OHM 1% 1/10W 0603", Case Code (Imperial)=0603, Case Code (Metric)=1608, Manufacturer=Yageo, Max Operating Temperature=155°C, Max Power Dissipation=100mW, Min Operating Temperature=-55°C, Package Quantity=1, Resistance=1MR, Resistor Type="Thick Film", Supplier Part Number 1=311-1MLDCT-ND, Temperature Coefficient=100ppm/°C, Tolerance=1%, Voltage Rating=50V, Case/Package=0603, Category="Chip SMD Resistors", ComponentLink1Description=https://datasheet.ciiva.com/5562/pyu-ac-51-rohs-l-2-5562551.pdf?src-supplier=Mouser, ComponentLink1URL=https://datasheet.ciiva.com/5562/pyu-ac-51-rohs-l-2-5562551.pdf?src-supplier=Mouser, Features="Moisture Resistant,Automotive AEC-Q200,Anti-Sulfur", Height=0.022inch, Lead Free="Lead Free", Length=0.063inch, Manufacturer Part Number=AC0603FR-071ML, Number of Terminations=2, Packaging="Tape and Reel", Power Rating=100mW, Pricing 1="1=0.10000, 10=0.02500, 100=0.01030, 1000=0.00464, 2500=0.00402 (USD)", RoHS=Yes, Stock 1=36423, Supplier 1=Digi-Key, Termination=SMD/SMT, Width=0.031inch
R4 R5 R6 R15: library part RC0603FR-0710KL, "Res General Purpose Thick Film 0603 10K Ohm 1% 1/10W ±100ppm/°C Molded SMD Paper T/R", Case Code (Imperial)=0603, Case Code (Metric)=1608, Manufacturer=Yageo, Max Operating Temperature=155°C, Min Operating Temperature=-55°C, Power Rating=100mW, Resistance=10kR, Resistor Type="Thick Film", Supplier Part Number 1=311-10.0KHRCT-ND, Temperature Coefficient=100ppm/°C, Tolerance=1%, Voltage Rating=75V, Voltage Rating (DC)=50V, Case/Package=0603, Category="Chip SMD Resistors", ComponentLink1Description=https://datasheet.ciiva.com/7660/38590-7660789.pdf?src-supplier=Element14, ComponentLink1URL=https://datasheet.ciiva.com/7660/38590-7660789.pdf?src-supplier=Element14, ComponentLink2Description=https://datasheet.ciiva.com/15189/getdatasheetpartid-409289-15189591.pdf?src-supplier=Verical, ComponentLink2URL=https://datasheet.ciiva.com/15189/getdatasheetpartid-409289-15189591.pdf?src-supplier=Verical, ComponentLink3Description=https://datasheet.ciiva.com/46440/1868787-46440891.pdf?src-supplier=Element14, ComponentLink3URL=https://datasheet.ciiva.com/46440/1868787-46440891.pdf?src-supplier=Element14, ComponentLink4Description=https://datasheet.ciiva.com/7983/443971-7983596.pdf?src-supplier=Element14, ComponentLink4URL=https://datasheet.ciiva.com/7983/443971-7983596.pdf?src-supplier=Element14, ComponentLink5Description=https://datasheet.ciiva.com/7746/1738695-7746239.pdf?src-supplier=Element14, ComponentLink5URL=https://datasheet.ciiva.com/7746/1738695-7746239.pdf?src-supplier=Element14, ComponentLink6Description=https://datasheet.ciiva.com/22747/443971-22747519.pdf?src-supplier=Element14, ComponentLink6URL=https://datasheet.ciiva.com/22747/443971-22747519.pdf?src-supplier=Element14, Depth=0.8mm, Height=0.45mm, Lead Free="Lead Free", Lead Pitch=0.3mm, Length=1.6mm, Manufacturer Part Number=RC0603FR-0710KL, Military Standard=Not, Number of Pins=2, Packaging="Tape and Reel", Pricing 1="1=0.10000, 10=0.02100, 100=0.00850, 1000=0.00382, 2500=0.00331 (USD)", REACH SVHC="No SVHC", RoHS=Yes, Stock 1=35778149, Supplier 1=Digi-Key, Termination=SMD/SMT, Weight=7.1E-05oz, Width=0.8mm
R7: library part RC0603FR-072K2L, "YAGEO - RC0603FR-072K2L.. - RES, THICK FILM, 2K2, 1%, 0.1W, 0603", Case Code (Imperial)=0603, Case Code (Metric)=1608, Manufacturer=Yageo, Max Operating Temperature=155°C, Max Power Dissipation=100mW, Min Operating Temperature=-55°C, Package Quantity=1, Resistance=2.2kR, Resistor Type="Thick Film", Supplier Part Number 1=311-2.20KHRCT-ND, Temperature Coefficient=100ppm/°C, Tolerance=1%, Voltage Rating=50V, Case/Package=0603, Category="Chip SMD Resistors", ComponentLink1Description=https://datasheet.ciiva.com/46440/1868787-46440902.pdf?src-supplier=Element14, ComponentLink1URL=https://datasheet.ciiva.com/46440/1868787-46440902.pdf?src-supplier=Element14, ComponentLink2Description=https://datasheet.ciiva.com/2453/pyu-r-int-thick-7-2453943.pdf?src-supplier=Digi-Key, ComponentLink2URL=https://datasheet.ciiva.com/2453/pyu-r-int-thick-7-2453943.pdf?src-supplier=Digi-Key, ComponentLink3Description=https://datasheet.ciiva.com/7660/1868787-7660791.pdf?src-supplier=Element14, ComponentLink3URL=https://datasheet.ciiva.com/7660/1868787-7660791.pdf?src-supplier=Element14, ComponentLink4Description=https://datasheet.ciiva.com/2453/pyu-r-int-thick-7-2453944.pdf?src-supplier=Digi-Key, ComponentLink4URL=https://datasheet.ciiva.com/2453/pyu-r-int-thick-7-2453944.pdf?src-supplier=Digi-Key, ComponentLink5Description=https://datasheet.ciiva.com/2453/pyu-r-int-thick-7-2453945.pdf?src-supplier=Digi-Key, ComponentLink5URL=https://datasheet.ciiva.com/2453/pyu-r-int-thick-7-2453945.pdf?src-supplier=Digi-Key, ComponentLink6Description=https://datasheet.ciiva.com/7746/1738695-7746315.pdf?src-supplier=Element14, ComponentLink6URL=https://datasheet.ciiva.com/7746/1738695-7746315.pdf?src-supplier=Element14, ComponentLink7Description=https://datasheet.ciiva.com/7746/1738695-7746316.pdf?src-supplier=Element14, ComponentLink7URL=https://datasheet.ciiva.com/7746/1738695-7746316.pdf?src-supplier=Element14, ComponentLink8Description=https://datasheet.ciiva.com/46394/443971-46394958.pdf?src-supplier=Element14, ComponentLink8URL=https://datasheet.ciiva.com/46394/443971-46394958.pdf?src-supplier=Element14, Depth=0.8mm, Features="Moisture Resistant", Height=0.022inch, Lead Free="Lead Free", Length=1.6mm, Manufacturer Part Number=RC0603FR-072K2L, Military Standard=Not, Number of Terminations=2, Packaging="Tape and Reel", Power Rating=100mW, Pricing 1="1=0.100000, 10=0.021000, 100=0.008500, 1000=0.003820, 2500=0.003310 (USD)", REACH SVHC="No SVHC", RoHS=Yes, Stock 1=5536514, Supplier 1=Digi-Key, Termination=SMD/SMT, Width=0.031inch
R8: library part RC0603FR-071KL, "RES SMD 1K OHM 1% 1/10W 0603", Case Code (Imperial)=0603, Case Code (Metric)=1608, Manufacturer=Yageo, Max Operating Temperature=155°C, Min Operating Temperature=-55°C, Power Rating=100mW, Resistance=1kR, Resistor Type="Thick Film", Supplier Part Number 1=311-1.00KHRCT-ND, Temperature Coefficient=100ppm/°C, Tolerance=1%, Voltage Rating=50V, Case/Package=0603, Category="Chip SMD Resistors", ComponentLink1Description=https://datasheet.ciiva.com/11808/0900766b80f96399-11808081.pdf?src-supplier=RSComponents, ComponentLink1URL=https://datasheet.ciiva.com/11808/0900766b80f96399-11808081.pdf?src-supplier=RSComponents, ComponentLink2Description=https://datasheet.ciiva.com/25906/pyu-rc0603-51-rohs-l-4-25906933.pdf?src-supplier=Avnet+Europe, ComponentLink2URL=https://datasheet.ciiva.com/25906/pyu-rc0603-51-rohs-l-4-25906933.pdf?src-supplier=Avnet+Europe, ComponentLink3Description=https://datasheet.ciiva.com/7660/1868787-7660790.pdf?src-supplier=Element14, ComponentLink3URL=https://datasheet.ciiva.com/7660/1868787-7660790.pdf?src-supplier=Element14, ComponentLink4Description=https://datasheet.ciiva.com/7746/1738695-7746279.pdf?src-supplier=Element14, ComponentLink4URL=https://datasheet.ciiva.com/7746/1738695-7746279.pdf?src-supplier=Element14, ComponentLink5Description=https://datasheet.ciiva.com/7746/1686128-7746280.pdf?src-supplier=Element14, ComponentLink5URL=https://datasheet.ciiva.com/7746/1686128-7746280.pdf?src-supplier=Element14, ComponentLink6Description=https://datasheet.ciiva.com/28386/pyu-rc0603-51-rohs-l-4-28386648.pdf?src-supplier=Avnet+Europe, ComponentLink6URL=https://datasheet.ciiva.com/28386/pyu-rc0603-51-rohs-l-4-28386648.pdf?src-supplier=Avnet+Europe, ComponentLink7Description=https://datasheet.ciiva.com/7746/1738695-7746281.pdf?src-supplier=Element14, ComponentLink7URL=https://datasheet.ciiva.com/7746/1738695-7746281.pdf?src-supplier=Element14, ComponentLink8Description=https://datasheet.ciiva.com/8896/pyu-rc0603-51-rohs-l-4-8896106.pdf?src-supplier=Avnet, ComponentLink8URL=https://datasheet.ciiva.com/8896/pyu-rc0603-51-rohs-l-4-8896106.pdf?src-supplier=Avnet, ComponentLink9Description=https://datasheet.ciiva.com/15189/getdatasheetpartid-404327-15189644.pdf?src-supplier=Verical, ComponentLink9URL=https://datasheet.ciiva.com/15189/getdatasheetpartid-404327-15189644.pdf?src-supplier=Verical, ComponentLink10Description=https://datasheet.ciiva.com/7983/443971-7983613.pdf?src-supplier=Element14, ComponentLink10URL=https://datasheet.ciiva.com/7983/443971-7983613.pdf?src-supplier=Element14, Contact Plating=Tin,Matte, Depth=0.8mm, Height=0.45mm, Lead Free="Lead Free", Length=1.6mm, Manufacturer Part Number=RC0603FR-071KL, Military Standard=Not, Packaging="Tape and Reel", Pricing 1="1=0.10000, 10=0.02100, 100=0.00850, 1000=0.00382, 2500=0.00331 (USD)", Radiation Hardening=No, REACH SVHC="No SVHC", RoHS=Yes, Stock 1=12968206, Supplier 1=Digi-Key, Termination=SMD/SMT
R9: library part RC0603FR-0712KL, "YAGEO - RC0603FR-0712KL - SMD Chip Resistor, 0603 [1608 Metric], 12 kohm, RC Series, 75 V, Thick Film, 100 mW", Case Code (Imperial)=0603, Case Code (Metric)=1608, Manufacturer=Yageo, Max Operating Temperature=155°C, Max Power Dissipation=100mW, Min Operating Temperature=-55°C, Package Quantity=1, Resistance=12kR, Resistor Type="Thick Film", Supplier Part Number 1=311-12.0KHRCT-ND, Temperature Coefficient=100ppm/°C, Tolerance=1%, Voltage Rating=50V, Case/Package=0603, Category="Chip SMD Resistors", Depth=0.8mm, Features="Moisture Resistant", Height=0.022inch, Lead Free="Lead Free", Length=0.063inch, Manufacturer Part Number=RC0603FR-0712KL, Military Standard=Not, Number of Pins=2, Number of Terminations=2, Packaging="Tape and Reel", Power Rating=100mW, Pricing 1="1=0.10000, 10=0.02100, 100=0.00850, 1000=0.00382, 2500=0.00331 (USD)", REACH SVHC="No SVHC", RoHS=Yes, Stock 1=408584, Supplier 1=Digi-Key, Termination=SMD/SMT, Voltage Rating (DC)=50V, Width=0.031inch
R10 R11 R12 R13 R14 R16 R17 R18 R21: library part RC0603FR-074K7L, "RES SMD 4.7K OHM 1% 1/10W 0603", Case Code (Imperial)=0603, Case Code (Metric)=1608, Manufacturer=Yageo, Max Operating Temperature=155°C, Min Operating Temperature=-55°C, Power Rating=100mW, Resistance=4.7kR, Resistor Type="Thick Film", Supplier Part Number 1=311-4.70KHRCT-ND, Temperature Coefficient=100ppm/°C, Tolerance=1%, Voltage Rating=50V, Case/Package=0603, Category="Chip SMD Resistors", ComponentLink1Description=https://datasheet.ciiva.com/15189/getdatasheetpartid-422754-15189760.pdf?src-supplier=Verical, ComponentLink1URL=https://datasheet.ciiva.com/15189/getdatasheetpartid-422754-15189760.pdf?src-supplier=Verical, ComponentLink2Description=https://datasheet.ciiva.com/22747/443971-22747528.pdf?src-supplier=Element14, ComponentLink2URL=https://datasheet.ciiva.com/22747/443971-22747528.pdf?src-supplier=Element14, ComponentLink3Description=https://datasheet.ciiva.com/7660/38590-7660794.pdf?src-supplier=Element14, ComponentLink3URL=https://datasheet.ciiva.com/7660/38590-7660794.pdf?src-supplier=Element14, ComponentLink4Description=https://datasheet.ciiva.com/7746/1868787-7746365.pdf?src-supplier=Element14, ComponentLink4URL=https://datasheet.ciiva.com/7746/1868787-7746365.pdf?src-supplier=Element14, ComponentLink5Description=https://datasheet.ciiva.com/46440/1868787-46440909.pdf?src-supplier=Element14, ComponentLink5URL=https://datasheet.ciiva.com/46440/1868787-46440909.pdf?src-supplier=Element14, ComponentLink6Description=https://datasheet.ciiva.com/7746/1738695-7746366.pdf?src-supplier=Element14, ComponentLink6URL=https://datasheet.ciiva.com/7746/1738695-7746366.pdf?src-supplier=Element14, Depth=0.8mm, Height=0.45mm, Lead Free="Lead Free", Lead Pitch=0.3mm, Length=1.6mm, Manufacturer Part Number=RC0603FR-074K7L, Military Standard=Not, Number of Pins=2, Packaging="Tape and Reel", Pricing 1="1=0.100000, 10=0.021000, 100=0.008400, 1000=0.003790, 2500=0.003290 (USD)", REACH SVHC="No SVHC", RoHS=Yes, Stock 1=6057521, Supplier 1=Digi-Key, Termination=SMD/SMT, Voltage Rating (DC)=50V, Width=0.8mm
R19 R20: library part RC0603FR-07220RL, "THICK FILM RESISTOR, 220 OHM, 100mW, 1%; Product Range:RC Series; Resistance:220ohm; Power Rating:100mW; Resistance Tolerance: 1%; Voltage Rating:50V; Resistor Case Style:0603 [1608 Metric]; Packaging:Cut Tape; MSL:-; No. of Pins:2 ;RoHS Compliant: Yes", Case Code (Imperial)=0603, Case Code (Metric)=1608, Manufacturer=Yageo, Max Operating Temperature=155°C, Max Power Dissipation=100mW, Min Operating Temperature=-55°C, Package Quantity=1, Resistor Type="Thick Film", Supplier Part Number 1=311-220HRCT-ND, Temperature Coefficient=100ppm/°C, Tolerance=1%, Voltage Rating=50V, Case/Package=0603, Category="Chip SMD Resistors", ComponentLink1Description=https://datasheet.ciiva.com/2453/pyu-r-int-thick-7-2453973.pdf?src-supplier=Digi-Key, ComponentLink1URL=https://datasheet.ciiva.com/2453/pyu-r-int-thick-7-2453973.pdf?src-supplier=Digi-Key, ComponentLink2Description=https://datasheet.ciiva.com/2453/pyu-r-int-thick-7-2453974.pdf?src-supplier=Digi-Key, ComponentLink2URL=https://datasheet.ciiva.com/2453/pyu-r-int-thick-7-2453974.pdf?src-supplier=Digi-Key, ComponentLink3Description=https://datasheet.ciiva.com/2453/pyu-r-int-thick-7-2453975.pdf?src-supplier=Digi-Key, ComponentLink3URL=https://datasheet.ciiva.com/2453/pyu-r-int-thick-7-2453975.pdf?src-supplier=Digi-Key, ComponentLink4Description=https://datasheet.ciiva.com/7746/1738695-7746300.pdf?src-supplier=Element14, ComponentLink4URL=https://datasheet.ciiva.com/7746/1738695-7746300.pdf?src-supplier=Element14, ComponentLink5Description=https://datasheet.ciiva.com/7746/1738695-7746301.pdf?src-supplier=Element14, ComponentLink5URL=https://datasheet.ciiva.com/7746/1738695-7746301.pdf?src-supplier=Element14, Depth=0.8mm, Features="Moisture Resistant", Height=0.022inch, Lead Free="Lead Free", Length=1.6mm, Manufacturer Part Number=RC0603FR-07220RL, Military Standard=Not, Number of Pins=2, Number of Terminations=2, Packaging="Tape and Reel", Power Rating=100mW, Pricing 1="1=0.10000, 10=0.02100, 100=0.00850, 1000=0.00382, 2500=0.00331 (USD)", REACH SVHC="No SVHC", Resistance=220R, RoHS=Yes, Stock 1=3633930, Supplier 1=Digi-Key, Termination=SMD/SMT, Voltage Rating (DC)=50V, Width=0.031inch
SW1 SW2 SW3 SW4: library part 204-211ST, "SWITCH SLIDE DIP DPST 50MA 24V", Current Rating=50mA, Manufacturer=CTS, Max Operating Temperature=85°C, Max Voltage Rating (DC)=24V, Min Operating Temperature=-55°C, Package Quantity=75, Supplier Part Number 1=CT204211ST-ND, Actuator Type="Slide (Standard)", Body Material=Plastic, Category="DIP Switches", ComponentLink1Description=https://datasheet.ciiva.com/26926/getdatasheetpartid-769803-26926535.pdf?src-supplier=Verical, ComponentLink1URL=https://datasheet.ciiva.com/26926/getdatasheetpartid-769803-26926535.pdf?src-supplier=Verical, ComponentLink2Description=https://datasheet.ciiva.com/15184/getdatasheetpartid-79409-15184804.pdf?src-supplier=Verical, ComponentLink2URL=https://datasheet.ciiva.com/15184/getdatasheetpartid-79409-15184804.pdf?src-supplier=Verical, ComponentLink3Description=https://datasheet.ciiva.com/2863/204-2863571.pdf?src-supplier=Digi-Key, ComponentLink3URL=https://datasheet.ciiva.com/2863/204-2863571.pdf?src-supplier=Digi-Key, ComponentLink4Description=https://datasheet.ciiva.com/29881/204-29881849.pdf?src-supplier=Avnet, ComponentLink4URL=https://datasheet.ciiva.com/29881/204-29881849.pdf?src-supplier=Avnet, Contact Material="Copper Alloy", Contact Plating=Gold, Depth=10.4mm, Electrical Life=5000Cycles, Lead Free="Lead Free", Length=0.286inch, Manufacturer Part Number=204-211ST, Max Current Rating=50mA, Mount="Surface Mount", Number of Positions=1, Orientation=Straight, Packaging=Rail/Tube, Pitch=0.1inch, Pricing 1="1=1.12000, 10=1.07400, 25=1.00920, 100=0.87190, 250=0.79460, 500=0.73878, 1000=0.68723, 2500=0.62280, 5000=0.57985 (USD)", Radiation Hardening=No, RoHS=Yes, Stock 1=484, Supplier 1=Digi-Key, Terminal Pitch=2.54mm, Termination="Gull Wing", Throw Configuration=DPST, Voltage Rating (DC)=24V, Washable=Yes
U1: library part FT2232H-56Q-TRAY, "IC DUAL USB TO UART/FIFO 56VQFN", Case/Package=VQFN, Manufacturer=FTDI, Max Operating Temperature=85°C, Min Operating Temperature=-40°C, Supplier Part Number 1=768-1276-ND, Category="Integrated Circuits (ICs)", ComponentLink1Description=http://www.mouser.com/ds/2/163/DS_FT2232H-17353.pdf?src-supplier=Mouser, ComponentLink1URL=http://www.mouser.com/ds/2/163/DS_FT2232H-17353.pdf?src-supplier=Mouser, ComponentLink2Description=http://www.ftdichip.com/Support/Documents/DataSheets/ICs/DS_FT2232H.pdf?src-supplier=Digi-Key, ComponentLink2URL=http://www.ftdichip.com/Support/Documents/DataSheets/ICs/DS_FT2232H.pdf?src-supplier=Digi-Key, Interface=UART, Manufacturer Part Number=FT2232H-56Q-TRAY, Packaging=Tray, Pricing 1="1=5.80000, 10=5.50000, 50=5.20000, 100=4.80000, 250=4.40000, 500=4.00002, 1000=3.95981 (USD)", RoHS=Yes, Stock 1=3176, Supplier 1=Digi-Key
U2: "MICROCHIP - 93LC56BT-I/OT. - 2K, 128 X 16, SERIAL EE, IND ROHS COMPLIANT: YES", Case/Package=SOT-23, Frequency=2MHz, Manufacturer=Microchip, Max Operating Temperature=85°C, Max Supply Voltage=5.5V, Min Operating Temperature=-40°C, Min Supply Voltage=2.5V, Nominal Supply Current=2mA, Package Quantity=3000, Supplier Part Number 1=93LC56BT-I/OTCT-ND, Access Time=250ns, Category=EEPROM, ComponentLink1Description=https://datasheet.ciiva.com/48496/jp013939-48496476.pdf?src-supplier=Avnet, ComponentLink1URL=https://datasheet.ciiva.com/48496/jp013939-48496476.pdf?src-supplier=Avnet, ComponentLink2Description=https://datasheet.ciiva.com/16216/filehandler-aspxddocname-en013939-16216574.pdf?src-supplier=Future+Electronics, ComponentLink2URL=https://datasheet.ciiva.com/16216/filehandler-aspxddocname-en013939-16216574.pdf?src-supplier=Future+Electronics, ComponentLink3Description=https://datasheet.ciiva.com/3185/jp013939-3185519.pdf?src-supplier=Avnet, ComponentLink3URL=https://datasheet.ciiva.com/3185/jp013939-3185519.pdf?src-supplier=Avnet, ComponentLink4Description=https://datasheet.ciiva.com/16622/jp013939-16622127.pdf?src-supplier=Avnet+Europe, ComponentLink4URL=https://datasheet.ciiva.com/16622/jp013939-16622127.pdf?src-supplier=Avnet+Europe, Contact Plating=Tin,Matte, Density=2Kb, Height=1.3mm, Interface=Serial, Lead Free="Lead Free", Length=3.1mm, Manufacturer Part Number=93LC56BT-I/OT, Max Frequency=2MHz, Memory Size=2Kb, Memory Type=EEPROM, Mount="Surface Mount", Number of Pins=6, Packaging="Tape and Reel", Pricing 1="1=0.22000, 25=0.21000, 100=0.20000 (USD)", Radiation Hardening=No, REACH SVHC="No SVHC", RoHS=Yes, Stock 1=6313, Supplier 1=Digi-Key, Width=1.8mm